# Altium PCB PCB1.PcbDoc
Units mil, origin at the board's own origin, x right, y up, seen from the top; angles counter-clockwise.
Board outline 560 x 1590 mil, 2 copper layers (Top Layer, Bottom Layer); 31 components, 35 nets, 137 pads, 39 vias.
Unrouted connection lines stored in the file: 2.
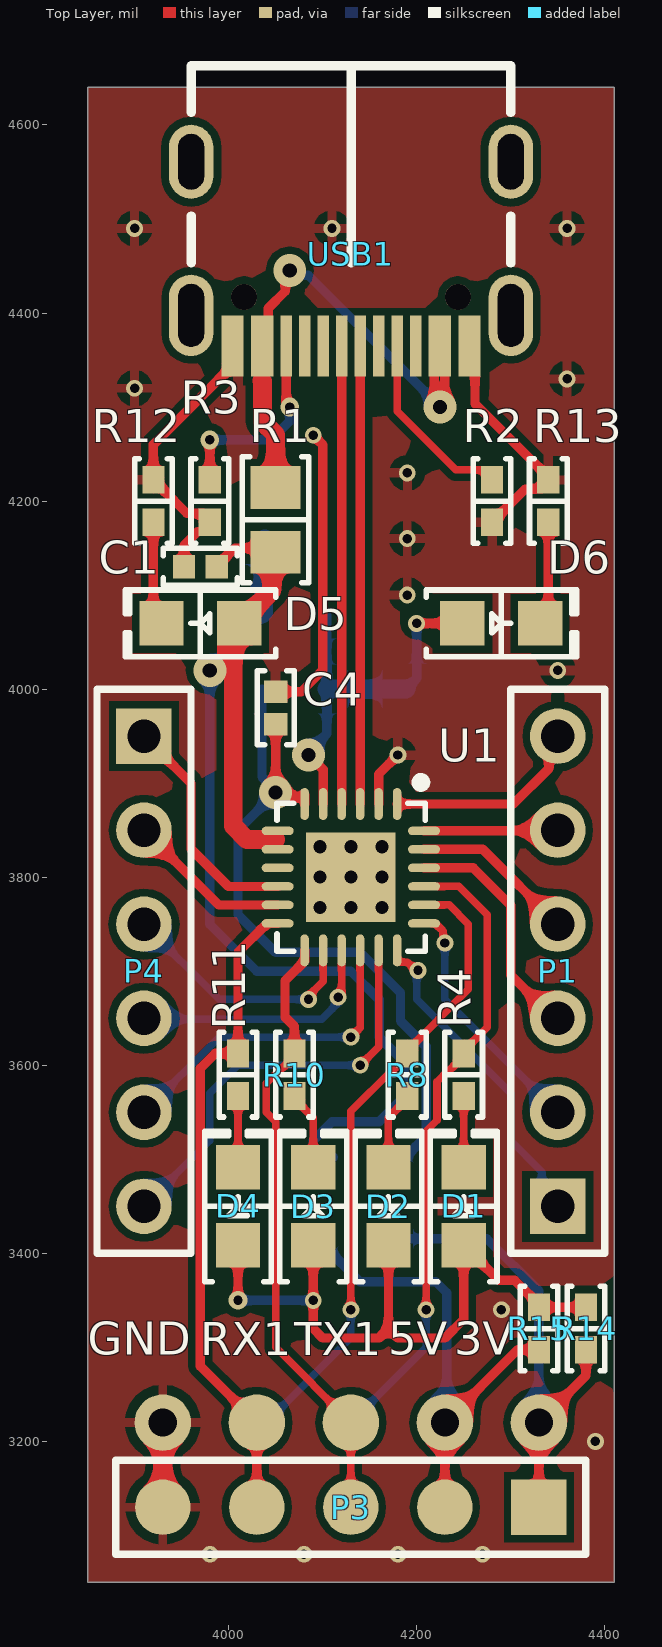
[diagram p0: Top Layer view]
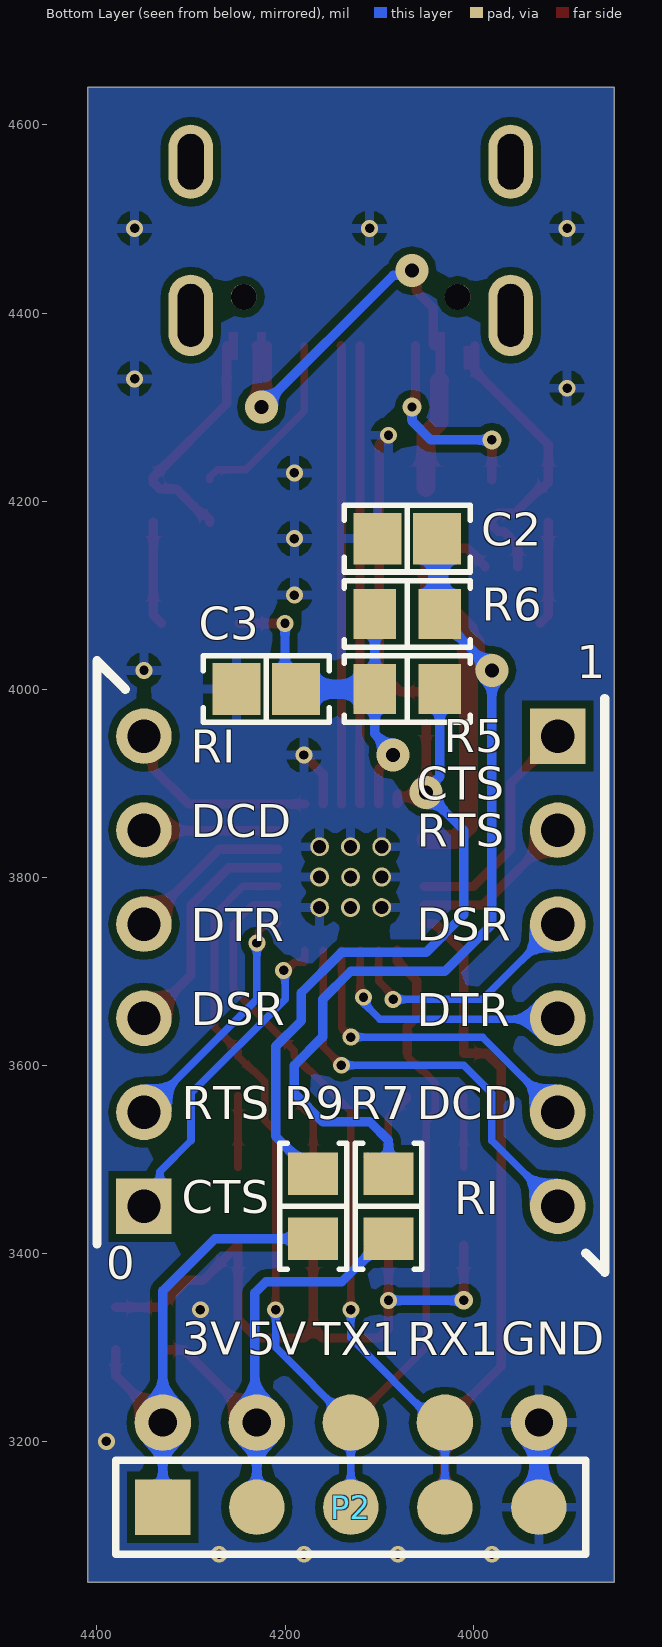
[diagram p1: Bottom Layer view, seen from below]

## Layer stack, top to bottom
Top Solder: solder mask 0.4, Solder Resist, Dk 3.5
Top Layer: signal copper 1.4
Dielectric 1: dielectric 12.6, FR-4, Dk 4.8
Bottom Layer: signal copper 1.4
Bottom Solder: solder mask 0.4, Solder Resist, Dk 3.5

## Board outline
3850,3050 4410,3050 4410,4640 3850,4640

## Design rules (kind name [scope] priority, off if disabled: settings)
Clearance [All] p1: gap=8 ignorepadtopadclearanceinfootprint=TRUE
MinimumSolderMaskSliver [InPadClass('All Pads')] p1: minsoldermaskwidth=5
PolygonConnect [All] p1: connectstyle=Relief reliefconductorwidth=10 reliefentries=4 polygonreliefangle="90 Angle" airgapwidth=10
RoutingVias [All] p1: holewidth=10 width=20 viastyle="Through Hole" minholewidth=10 minwidth=18 maxholewidth=28 maxwidth=50
SilkToSilkClearance [All] p1: silktosilkclearance=0
SilkToSolderMaskClearance [IsPad] p1: minsilkscreentomaskgap=0 clearancetoexposedcopper=TRUE
SolderMaskExpansion [All] p1: expansion=4 istentingtop=FALSE
Width [All] p1: maxlimit=20 minlimit=5 preferedwidth=10
27 further rules are at their usual default settings.

## Components (designator, comment, footprint, x,y, rotation, side; value= is the part's Value field where it differs from the comment)
C1 "0.1uF" "CAP 0402/1005" 3970,4130 r0 top
C2 "10uF" "CAP 0805/2012" 4070,4160 r180 bottom
C3 "10uF" "CAP 0805/2012" 4220,4000 r180 bottom
C4 "0.1uF" "CAP 0402/1005" 4050,3980 r270 top
D1 "Green" "LED 0805/2012 GREEN" 4250,3450 r90 top
D2 "Green" "LED 0805/2012 GREEN" 4170,3450 r90 top
D3 "Green" "LED 0805/2012 GREEN" 4090,3450 r90 top
D4 "Green" "LED 0805/2012 GREEN" 4010,3450 r90 top
D5 "Green" "LED 0805/2012 GREEN" 3970,4070 r180 top
D6 "Green" "LED 0805/2012 GREEN" 4290,4070 r0 top
P1 "Header 6" HDR1X6 4350,3450 r90 top locked
P2 "Header 5" HDR1X5 4330,3130 r180 bottom locked
P3 "Header 5" HDR1X5 4330,3130 r180 top locked
P4 "Header 6" HDR1X6 3910,3950 r270 top locked
R1 "0.0" "RES 0805/2012" 4050,4180 r270 top
R2 "5.1k" "RES 0402/1005" 4280,4200 r90 top
R3 "5.1k" "RES 0402/1005" 3980,4200 r270 top
R4 "2k" "RES 0402/1005" 4250,3590 r270 top
R5 "0.0" "RES 0805/2012" 4070,4000 r0 bottom
R6 "0.0" "RES 0805/2012" 4070,4080 r180 bottom
R7 "0.0" "RES 0805/2012" 4090,3450 r270 bottom
R8 "2k" "RES 0402/1005" 4190,3590 r270 top
R9 "0.0" "RES 0805/2012" 4170,3450 r270 bottom
R10 "2k" "RES 0402/1005" 4070,3590 r270 top
R11 "2k" "RES 0402/1005" 4010,3590 r270 top
R12 "2k" "RES 0402/1005" 3920,4200 r270 top
R13 "2k" "RES 0402/1005" 4340,4200 r270 top
R14 "0.0" "RES 0402/1005" 4380,3320 r270 top
R15 "0.0" "RES 0402/1005" 4330,3320 r270 top
U1 "CH342F" QFN24_4X4 4130,3800 r180 top locked
USB1 "KH-TYPE-C-16P-T" TYPE-C-M-16P 4130.16,4663.23 r180 top locked

## Footprints (in the part's own frame and the unit in brackets; to place one, negate y for a bottom-side part, rotate by r counter-clockwise, add the part's x,y. Pads: shape width x height; smd on the part's side, far side on the other; paste and mask are expansions set on the pad)
"CAP 0402/1005" [mm] "Chip Capacitor, 2-Leads, Body 1.02x0.51mm, IPC Medium Density"
  rect 0.6x0.64 smd: 1(-0.44,0) 2(0.44,0)
  silkscreen extent -1,-0.5 1,0.5, body extent -0.5,-0.26 0.5,0.26, height 0.52
"CAP 0805/2012" [mm] "Chip Capacitor, 2-Leads, Body 2.00x1.20mm, IPC Medium Density"
  rect 1.3x1.4 smd: 1(-0.8,0) 2(0.8,0)
  silkscreen extent -1.7,-0.9 1.7,0.9, body extent -1,-0.64 1,0.64, height 1.26
HDR1X5 [mm] "Connector; Header; 5 Position"
  rect 1.5x1.5 smd: 1(0,0)
  round 1.5 smd: 2(2.54,0) 3(5.08,0) 4(7.62,0) 5(10.16,0)
  silkscreen extent -1.27,-1.27 11.43,1.27
HDR1X6 [mm] "Connector; Header; 6 Position"
  rect 1.5x1.5 hole 0.9: 1(0,0)
  round 1.5 hole 0.9: 2(2.54,0) 3(5.08,0) 4(7.62,0) 5(10.16,0) 6(12.7,0)
  silkscreen extent -1.27,-1.27 13.97,1.27
"LED 0805/2012 GREEN" [mm] "Chip Diode, 2-Leads, Body 2.00x1.25mm, IPC Medium Density"
  rect 1.2x1.2 smd: 1(-1.05,0) 2(1.05,0)
  silkscreen extent -2.03,-0.9 2.03,0.9, body extent -1,-0.62 1,0.63, height 0.9
QFN24_4X4 [mil]
  round 20 hole 14: 0(-33.21,32.2) 0(-33.21,-32.4) 0(-0.21,-0.1) 0(32.79,32.2) 0(32.79,-32.4)
  rect 95x95 smd: 0(0,0)
  oval 9x34 smd: 1(-49.21,-77.8) 2(-29.53,-77.8) 3(-9.84,-77.8) 4(9.84,-77.8) 5(29.53,-77.8) 6(49.21,-77.8) 13(49.21,77.8) 14(29.53,77.8) 15(9.84,77.8) 16(-9.84,77.8) 17(-29.53,77.8) 18(-49.21,77.8)
  oval 34x9 smd: 7(77.8,-49.21) 8(77.8,-29.53) 9(77.8,-9.84) 10(77.8,9.84) 11(77.8,29.53) 12(77.8,49.21) 19(-77.8,49.21) 20(-77.8,29.53) 21(-77.8,9.84) 22(-77.8,-9.84) 23(-77.8,-29.53) 24(-77.8,-49.21)
  silkscreen extent -79,-106 78,79
"RES 0402/1005" [mm] "Chip Resistor, 2-Leads, Body 1.0x0.5mm, IPC Medium Density"
  rect 0.75x0.6 smd: 1(-0.575,0) 2(0.575,0)
  silkscreen extent -1.14,-0.51 1.14,0.51, body extent -0.5,-0.25 0.5,0.25, height 0.35
"RES 0805/2012" [mm] "Chip Resistor, 2-Leads, Body 2.00x1.25mm, IPC Medium Density"
  rect 1.15x1.35 smd: 1(-0.875,0) 2(0.875,0)
  silkscreen extent -1.7,-0.9 1.7,0.9, body extent -0.95,-0.62 1.05,0.63, height 0.6
TYPE-C-M-16P [mm] "Type-C母座 16PIN 立式四角贴板双压片"
  oval 1.2x2.2 hole 0.7 slot 1.7 at 90 deg: 0(-4.32,6.75) 0(4.32,6.75)
  oval 1.2x2 hole 0.7 slot 1.5 at 90 deg: 0(-4.32,2.6) 0(4.32,2.6)
  rect 0.3x1.65 smd: A1(-3.35,7.575) A4(-2.55,7.575) A5(-1.25,7.575) A6(-0.25,7.575) A7(0.25,7.575) A8(1.25,7.575) A9(2.55,7.575) A12(3.35,7.575) B1(3.05,7.575) B4(2.25,7.575) B5(1.75,7.575) B6(0.75,7.575) B7(-0.75,7.575) B8(-1.75,7.575) B9(-2.25,7.575) B12(-3.05,7.575)
  round 0.7 hole 0.7 unplated mask+0: ""(-2.89,6.25) ""(2.89,6.25)
  silkscreen extent -4.32,0 4.32,5.33, body extent -4.47,0.03 4.47,7.93, height 3.25

## Part data
C1 C4: library part C1005X7R1C104K050BC, "CAP CER 0.1UF 16V X7R 0402", Device Package="0402 (1005 Metric)", Manufacturer="TDK Corporation", Supplier Part Number 1=445-4952-2-ND, TemperatureCoefficient=X7R, TemperatureRange="-55C ~ 125C", Tolerance=10%, Voltage=16V, ComponentLink1Description=Datasheet, ComponentLink1URL=https://product.tdk.com/info/en/catalog/datasheets/mlcc_commercial_general_en.pdf, ComponentLink2Description="Digi-Key listing", ComponentLink2URL=http://digikey.com/product-detail/en/C1005X7R1C104K050BC/445-4952-2-ND/2093220, Part Number=C1005X7R1C104K050BC, PartId=3856, Price=0.0066, Supplier 1=Digi-Key, Type=-
C2 C3: library part C2012X5R1A106K125AB, "CAP CER 10UF 10V X5R 0805", Device Package="0805 (2012 Metric)", Manufacturer="TDK Corporation", Supplier Part Number 1=445-7660-2-ND, TemperatureCoefficient=X5R, TemperatureRange="-55C ~ 85C", Tolerance=10%, Voltage=10V, ComponentLink1Description=Datasheet, ComponentLink1URL=https://product.tdk.com/info/en/catalog/datasheets/mlcc_commercial_general_en.pdf, ComponentLink2Description="Digi-Key listing", ComponentLink2URL=http://digikey.com/product-detail/en/C2012X5R1A106K125AB/445-7660-2-ND/2345074, Part Number=C2012X5R1A106K125AB, PartId=4519, Price=0.0521, Supplier 1=Digi-Key, Type=-
D1 D2 D3 D4 D5 D6: library part LTST-C171GKT, "LED GREEN CLEAR 0805 SMD", Current (Test)=20mA, Device Package="0805 (2012 Metric)", Manufacturer="Lite-On Inc.", Supplier Part Number 1=160-1423-2-ND, Voltage Forward=2.1V, Colour=Green, ComponentLink1Description=Datasheet, ComponentLink1URL=http://media.digikey.com/pdf/Data%20Sheets/Lite-On%20PDFs/LTST-C171GKT.pdf, ComponentLink2Description="Digi-Key Listing", ComponentLink2URL=http://www.digikey.ca/product-detail/en/LTST-C171GKT/160-1423-2-ND/386793, Lens Transparency=Clear, Millicandela=12mcd, Part Number=LTST-C171GKT, PartId=7075, Price=0.0599, Supplier 1=Digi-Key, Type="Surface Mount", Viewing Angle=130
P1 P4: "Header, 6-Pin", LatestRevisionDate=17-Jul-2002, LatestRevisionNote="Re-released for DXP Platform.", Publisher="Altium Limited"
P2 P3: "Header, 5-Pin", LatestRevisionDate=17-Jul-2002, LatestRevisionNote="Re-released for DXP Platform.", Publisher="Altium Limited"
R1 R5 R6 R7 R9: library part MCR10EZPJ000, "RES SMD 0.0 OHM JUMPER 1/8W 0805", Device Package="0805 (2012 Metric)", Manufacturer="Rohm Semiconductor", PowerRating="0.125W, 1/8W", Supplier Part Number 1=RHM0.0ARTR-ND, TemperatureRange="-55C ~ 155C", Tolerance=Jumper, ComponentLink1Description=Datasheet, ComponentLink1URL=http://rohmfs.rohm.com/en/products/databook/datasheet/passive/resistor/chip_resistor/mcr.pdf, ComponentLink2Description="Digi-Key Listing", ComponentLink2URL=https://www.digikey.com/product-detail/en/rohm-semiconductor/MCR10EZPJ000/RHM0.0ARTR-ND/1213299, Part Number=MCR10EZPJ000, PartId=16153, Price=0.0049, Supplier 1=Digi-Key
R2 R3: library part ERJ-2RKF5101X, "RES SMD 5.1K OHM 1% 1/10W 0402", Device Package="0402 (1005 Metric)", Manufacturer="Panasonic Electronic Components", PowerRating="0.1W, 1/10W", Supplier Part Number 1=P5.10KLTR-ND, TemperatureCoefficient=100ppm/C, TemperatureRange="-55C ~ 155C", Tolerance=1%, ComponentLink1Description=Datasheet, ComponentLink1URL=http://industrial.panasonic.com/www-cgi/jvcr13pz.cgi?E+PZ+3+AOA0002+ERJ2RKF5101X+7+WW, ComponentLink2Description="Digikey listing", ComponentLink2URL=http://digikey.com/product-detail/en/ERJ-2RKF5101X/P5.10KLTR-ND/1746242, Part Number=ERJ-2RKF5101X, PartId=274, Price=0.0043, Supplier 1=Digi-Key, Type="Thick Film"
R4 R8 R10 R11 R12 R13: library part RC0402JR-072KL, "RES SMD 2K OHM 5% 1/16W 0402", Device Package="0402 (1005 Metric)", Manufacturer=Yageo, PowerRating="0.063W, 1/16W", Supplier Part Number 1=311-2.0KJRTR-ND, TemperatureCoefficient=100ppm/C, TemperatureRange="-55C ~ 155C", Tolerance=5%, ComponentLink1Description=Datasheet, ComponentLink1URL=http://www.yageo.com/documents/recent/PYu-RC_Group_51_RoHS_L_04.pdf, ComponentLink2Description="Digi-Key Listing", ComponentLink2URL=https://www.digikey.com/product-detail/en/yageo/RC0402JR-072KL/311-2.0KJRTR-ND/726434, Part Number=RC0402JR-072KL, PartId=14511, Price=0.0017, Supplier 1=Digi-Key
R14 R15: library part ERJ-2GE0R00X, "RES SMD 0.0OHM JUMPER 1/10W 0402", Device Package="0402 (1005 Metric)", Manufacturer="Panasonic Electronic Components", PowerRating="0.1W, 1/10W", Supplier Part Number 1=P0.0JTR-ND, TemperatureRange="-55C ~ 155C", Tolerance=Jumper, ComponentLink1Description=Datasheet, ComponentLink1URL=http://industrial.panasonic.com/www-cgi/jvcr13pz.cgi?E+PZ+3+AOA0001+ERJ2GE0R00X+7+WW, ComponentLink2Description="Digi-Key Listing", ComponentLink2URL=https://www.digikey.com/product-detail/en/panasonic-electronic-components/ERJ-2GE0R00X/P0.0JTR-ND/146727, Part Number=ERJ-2GE0R00X, PartId=16129, Price=0.0029, Supplier 1=Digi-Key
U1: "USB to dual enhanced TTL Serial / 2*UART"
USB1: "Type-C母座 16PIN 立式四角贴板双压片"

## Free pads (board coordinates)
  round 60 smd: 4(3930,3220) 5(4130,3220) 6(4030,3220) 7(4230,3220) 8(4330,3220)
  round 60 smd far side: 9(4130,3220) 10(4030,3220) 11(3930,3220) 12(4230,3220) 13(4330,3220)
  round 60 hole 30: 14(4230,3220) 15(4330,3220) 16(3930,3220)

## Via types
v1: diameter 18, hole 10, Top Layer to Bottom Layer, tented both sides, 27 vias
v2: diameter 35, hole 15, Top Layer to Bottom Layer, tented both sides, 5 vias
v3: diameter 20, hole 14, Top Layer to Bottom Layer, 4 vias
v4: diameter 20, hole 10, Top Layer to Bottom Layer, tented both sides, 3 vias

## Nets (pads, with @x,y where several pads share a name; then routed paths per layer and width w, separated by ;. In a path a pad name is that pad's centre, name@x,y a point inside that pad or via, vN(x,y) a via of type N, cw(c..) or ccw(c..) an arc to the next point about the centre after c; other vN are vias at no path point)
+5: R1.1 USB1.A4 USB1.A9 USB1.B4 USB1.B9 | length 564.3
  Top Layer w10: USB1.B4 4042.35,4365.78 4042.35,4405.27 4060.22,4423.13 4060.22,4440.22 v2(4065,4445) ; USB1.B9 4218.74,4313.02 4225,4306.76 v2(4225,4300) 4229.65,4304.65 4229.65,4364.09 USB1.A4
  Top Layer w20: 4035.48,4328.05 4035.98,4327.54 4035.98,4284.32 4050,4270.31 R1.1
  Bottom Layer w10: v2(4065,4445) 4069.78,4440.22 4084.78,4440.22 v2(4225,4300)
CTS0: P1.1 U1.18 | length 351.8
  Top Layer w8: U1.18 4179.21,3709.97 4179.67,3709.51 4190.11,3709.51 4198.71,3700.9 v1(4201.42,3700.9)
  Bottom Layer w8: v1(4201.42,3700.9) 4200,3699.48 4200,3670 4300,3570 4300,3520 4333.16,3486.84 4333.16,3466.84 P1.1
CTS1: P4.1 U1.10 | length 249.4
  Top Layer w10: P4.1 3960,3900 3960,3830 3999.84,3790.16 U1.10
DCD0: P1.5 U1.24 | length 142.5
  Top Layer w10: U1.24 4208.2,3849.61 4349.61,3849.61 P1.5
DCD1: P4.5 U1.16 | length 349.4
  Top Layer w8: v1(4130,3630) 4139.84,3639.84 U1.16
  Bottom Layer w8: P4.5 3990,3630 v1(4130,3630)
DSR0: P1.3 U1.22 | length 251.8
  Top Layer w10: U1.22 4260.16,3809.84 4300,3770 4300,3695.86 4345.86,3650 P1.3
DSR1: P4.3 U1.14 | length 266.7
  Top Layer w8: v1(4085,3670) 4085,3673.86 4100.47,3689.33 U1.14
  Bottom Layer w8: P4.3 3990,3670 v1(4085,3670)
DTR0: P1.4 U1.23 | length 175.1
  Top Layer w10: U1.23 4270.47,3829.53 P1.4
DTR1: P4.4 U1.15 | length 271.4
  Top Layer w8: v1(4116.55,3672.34) 4118.47,3674.25 4118.47,3678.47 4120.08,3680.08 4120.08,3722.12 U1.15
  Bottom Layer w8: P4.4 3911,3649 4099,3649 4116.55,3666.55 v1(4116.55,3672.34)
GND: C1.1 C2.1 C3.1 C4.1 P2.5 P3.5 pad.4 pad.11 pad.16 R2.1 R3.2 R12.1 R13.1 U1.0 U1.2 USB1.A1 USB1.A12 USB1.B1 USB1.B12 | length 1130.2
  Top Layer w10: C1.1 3952.68,4152.99 3967.28,4167.6 3973.19,4167.6 3980,4174.41 R3.2 3980,4180.31 3973.19,4187.13 3955.51,4187.13 3929.76,4212.87 3926.81,4212.87 3920,4219.69 R12.1 3920,4260.16 3998.27,4338.43 USB1.A12 ; C4.1 4077.32,3997.32 4100,4020 4100,4260 v1(4090,4270) ; U1.2 4159.53,3909.53 v1(4180,3930) ; USB1.A1 4262.05,4303.54 4340,4225.59 R13.1 4340,4219.69 4333.19,4212.87 4315.51,4212.87 4289.76,4187.13 4286.81,4187.13 4280,4180.31 R2.1
  Top Layer w20: P3.5 pad.4
  Bottom Layer w20: P2.5 pad.16
  other v1: 3980,3080 4080,3080 4180,3080 4270,3080 4390,3200 4290,3340 4350,4020 4190,4100 4190,4160 4190,4230 3900,4320 4360,4330 3900,4490 4110,4490 4360,4490
  other v3: 4130.21,3767.8 4097.21,3800.1 4163.21,3800.1 4130.21,3832.4
NetD1_1: D1.1 D2.1 D3.1 D4.1 R14.1 R15.1 | length 734.4
  Top Layer w10: v4(4010,3350) D4.1 ; D3.1 v1(4090,3350) 4090,3320 4100,3310 4160,3310 4170,3320 ; D2.1 4170,3320 ; R14.1 R15.1 4330,3345.59 4304.37,3371.22 4287.44,3371.22 D1.1 4250,3330 4230,3310 4180,3310 4170,3320
  Bottom Layer w10: v4(4010,3350) v1(4090,3350)
NetD1_2: D1.2 R4.2 | length 76
  Top Layer w8: D1.2 R4.2
NetD2_2: D2.2 R8.2 | length 84.3
  Top Layer w8: D2.2 4170,3544.41 4190,3564.41 R8.2
NetD3_2: D3.2 R10.2 | length 84.3
  Top Layer w8: R10.2 4070,3564.41 4090,3544.41 D3.2
NetD4_2: D4.2 R11.2 | length 76
  Top Layer w8: D4.2 R11.2
NetD5_2: D5.2 R12.2 | length 110.9
  Top Layer w10: R12.2 3920,4078.66 D5.2
NetD6_2: D6.2 R13.2 | length 110.9
  Top Layer w10: D6.2 4340,4078.66 R13.2
NetP2_1: P2.1 P3.1 pad.8 pad.13 pad.15 R9.2 R14.2 | length 601.1
  Top Layer w10: P3.1 pad.8 4380,3270 R14.2
  Bottom Layer w10: R9.2 4274.45,3415.55 4330,3360 pad.15 P2.1
NetP2_2: P2.2 P3.2 pad.7 pad.12 pad.14 R7.2 R15.2 | length 616.7
  Top Layer w10: P3.2 pad.7 4307.36,3297.36 R15.2
  Bottom Layer w10: R7.2 4093.94,3415.55 4139.74,3369.74 4220.26,3369.74 4232,3358 4232,3222 pad.14 P2.2
NetR2_2: R2.2 USB1.A5 | length 202
  Top Layer w8: USB1.A5 4179.37,4295.63 4241.6,4233.4 4272.19,4233.4 4280,4225.59 R2.2
NetR3_1: R3.1 USB1.B5 | length 217.2
  Top Layer w10: R3.1 v4(3980,4265) ; USB1.B5 4061.26,4306.45 4065,4302.71 v4(4065,4300)
  Bottom Layer w10: v4(3980,4265) 4045,4265 4065,4285 v4(4065,4300)
RI0: P1.6 U1.1 | length 215.3
  Top Layer w10: U1.1 4302.8,3877.8 4340.61,3915.61 4340.61,3940.61 P1.6
RI1: P4.6 U1.17 | length 451.7
  Top Layer w8: v1(4140,3600) 4159.53,3619.53 U1.17
  Bottom Layer w8: P4.6 3980,3520 3980,3570 4010,3600 v1(4140,3600)
RST#: U1.9
RTS0: P1.2 U1.19 | length 266.9
  Top Layer w8: U1.19 4220.03,3750.79 4228.09,3742.73 4228.09,3731.91 v1(4230,3730)
  Bottom Layer w8: v1(4230,3730) 4230,3670 P1.2
RTS1: P4.2 U1.11 | length 175.1
  Top Layer w10: P4.2 3989.53,3770.47 U1.11
RXD0: P2.4 pad.10 R8.1 U1.20 | length 775.4
  Top Layer w8: v1(4130,3340) 4130,3550.91 4173.22,3594.13 4174.44,3594.13 4190,3609.68 R8.1 4190,3615.59 4255,3680.59 4255,3750 4234.53,3770.47 U1.20
  Bottom Layer w8: P2.4 pad.10 4040,3220 4130,3310 v1(4130,3340)
RXD1: P3.4 pad.6 R11.1 U1.12 | length 700.6
  Top Layer w10: P3.4 pad.6 3970,3280 3970,3596.78 3985.86,3612.64 R11.1 4010,3720.09 4040.7,3750.79 U1.12
TXD0: P2.3 pad.9 R4.1 U1.21 | length 770.5
  Top Layer w8: U1.21 4244.84,3790.16 4275,3760 4275,3640.59 4250,3615.59 R4.1 4250,3609.68 4234.44,3594.13 4233.22,3594.13 4221.61,3582.52 4221.61,3541.61 4210,3530 v1(4210,3340)
  Bottom Layer w8: P2.3 pad.9 4210,3300 v1(4210,3340)
TXD1: P3.3 pad.5 R10.1 U1.13 | length 655.4
  Top Layer w8: R10.1 4070,3609.68 4054.44,3594.13 4053.22,3594.13 4040,3580.91 4040,3550 4050,3540 4050,3300 pad.5 P3.3
  Top Layer w10: R10.1 4070,3641.27 4060,3651.27 4060,3689.91 4080.79,3710.7 U1.13
UDN: U1.4 USB1.A7 USB1.B7 | length 487.5
  Top Layer w10: U1.4 4120.5,3878.15 4120.5,3942.63 4120.24,3942.9 4120.24,4299.92 4120.31,4300 USB1.A7
UDP: U1.3 USB1.A6 USB1.B6 | length 487.3
  Top Layer w10: U1.3 4139.92,3877.88 4139.92,4364.92 USB1.A6
V3: C4.2 R5.1 R9.1 U1.6 | length 790.2
  Top Layer w10: v2(4050,3890) C4.2 ; v2@4050.43,3890 4055.21,3885.22 4080.29,3885.22 U1.6@4080.79,3884.72 ; U1.6@4080.29,3888.2 4080.79,3887.7 U1.6@4080.79,3884.72 ; U1.6 U1.6@4080.79,3884.72
  Bottom Layer w10: R5.1 4035.55,3906.61 4050,3892.16 v2(4050,3890) 4010,3850 4010,3760 4050,3720 4140,3720 4182.84,3677.16 4182.84,3647.16 4210,3620 4210,3524.45 4191.57,3506.02 4191.57,3502.09 4186.78,3497.29 R9.1@4182.84,3497.29
VBUS: C1.2 C2.2 D5.1 R1.2 R6.2 R7.1 U1.7 U1.8 | length 1433.8
  Top Layer w10: v2(3980,4020) 3980,4022.16 3992.72,4034.88 3992.72,4051.38 D5.1 ; C1.2 3987.32,4130.79 4006.54,4150 4037.49,4150 R1.2@4045.97,4141.52
  Top Layer w20: R1.2@4045.97,4141.52 4045.97,4104.63 D5.1 4005,4063.66 4005,3854.52 4019.52,3840 4050,3840
  Bottom Layer w10: R6.2 4035.55,4076.06 3980,4020.51 v2(3980,4020) 3980,3750 4030,3700 4130,3700 4160,3670 4160,3630 4190,3600 4190,3570 4160,3540 4110,3540 4090,3520 R7.1 4093.94,3484.45 R7.1@4111.57,3502.09
  Bottom Layer w20: R6.2 4037.03,4081.48 4037.03,4158.52 C2.2
VIO: C3.2 D6.1 R5.2 R6.1 U1.5 | length 424.1
  Top Layer w10: v2(4085,3930) 4100.47,3914.53 U1.5 ; v1(4200,4070) D6.1
  Bottom Layer w10: v2(4085,3930) 4085,3932.92 4104.45,3952.37 R5.2 R6.1 ; C3.2 4200,4011.5 v1(4200,4070)
  Bottom Layer w20: R5.2 C3.2
pads on no net: USB1. USB1.0 USB1.A8 USB1.B8

## Polygon pours and split planes (outlines as drawn)
GND on Top Layer "Top Layer-No Net" (solid, remove dead copper, pour order 0): 3850,3050 4410,3050 4410,4640 3850,4640
GND on Bottom Layer "Bottom Layer-No Net" (solid, remove dead copper, pour order 1): 3850,3050 4410,3050 4410,4640 3850,4640

## Other copper
Top Layer:
  rectangle net +5: 4030,4340 4040,4380
  rectangle net +5: 4220,4334.37 4229.65,4380
  rectangle net GND: 4250,4350 4260,4380
  rectangle net GND: 3998.27,4340 4010,4365
  rectangle net +5: 4029.76,4300 4040,4365

## Silkscreen, mask and mechanical layers (free items; w line width, h text height)
Top Overlay:
  text "GND" at 3850,3280.67 h60
  text "5V" at 4170,3280.67 h60
  text "3V" at 4240,3280.67 h60
  text "RX1" at 3970,3280 h60
  text "TX1" at 4070,3280 h60
Bottom Overlay:
  lines w10: 3860,3990 3860,3380 3880,3400 ; 4370,4000 4400,4030 4400,3410
  text "1" at 3890,4000 h60
  text "RI" at 4300,3910 h60
  text "CTS" at 4060,3870.67 h60
  text "DCD" at 4300,3830.67 h60
  text "RTS" at 4060,3820.67 h60
  text "DSR" at 4060,3720.67 h60
  text "DTR" at 4300,3720 h60
  text "DSR" at 4300,3630.67 h60
  text "DTR" at 4060,3630 h60
  text "DCD" at 4060,3530.67 h60
  text "RTS" at 4310,3530.67 h60
  text "CTS" at 4310,3430.67 h60
  text "RI" at 4020,3430 h60
  text "0" at 4390,3360.67 h60
  text "GND" at 3970,3280.67 h60
  text "5V" at 4240,3280.67 h60
  text "3V" at 4310,3280.67 h60
  text "RX1" at 4070,3280 h60
  text "TX1" at 4170,3280 h60
Mechanical 1:
  the board outline again, w10